# Altium PCB Smartlock.PcbDoc
Units mil, origin at the board's own origin, x right, y up, seen from the top; angles counter-clockwise.
Board outline 3085 x 2710 mil, 2 copper layers (Top Layer, Bottom Layer); 13 components, 23 nets, 69 pads, 0 vias.
Unrouted connection lines stored in the file: 1.
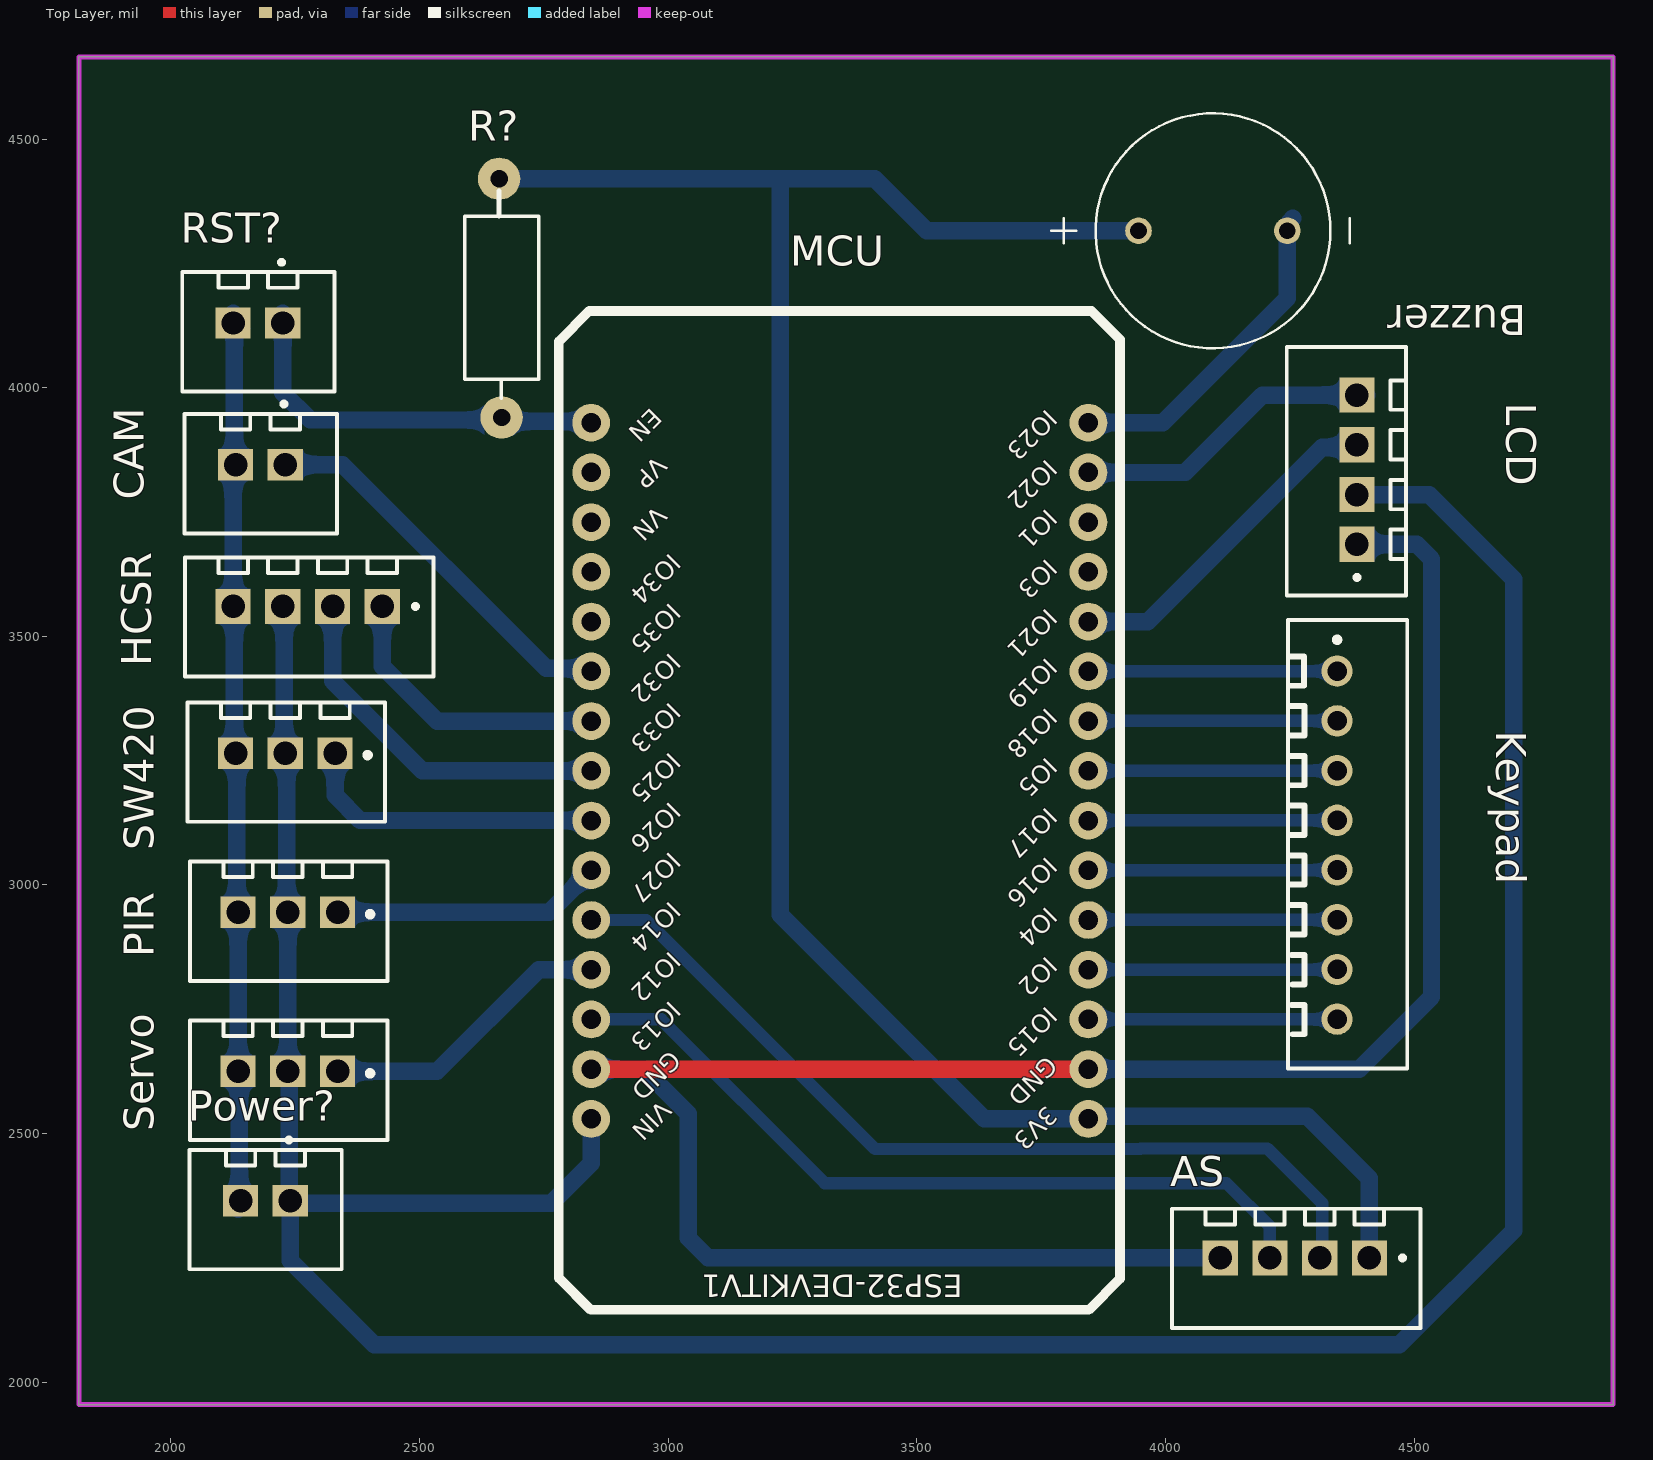
[diagram p0: Top Layer view]
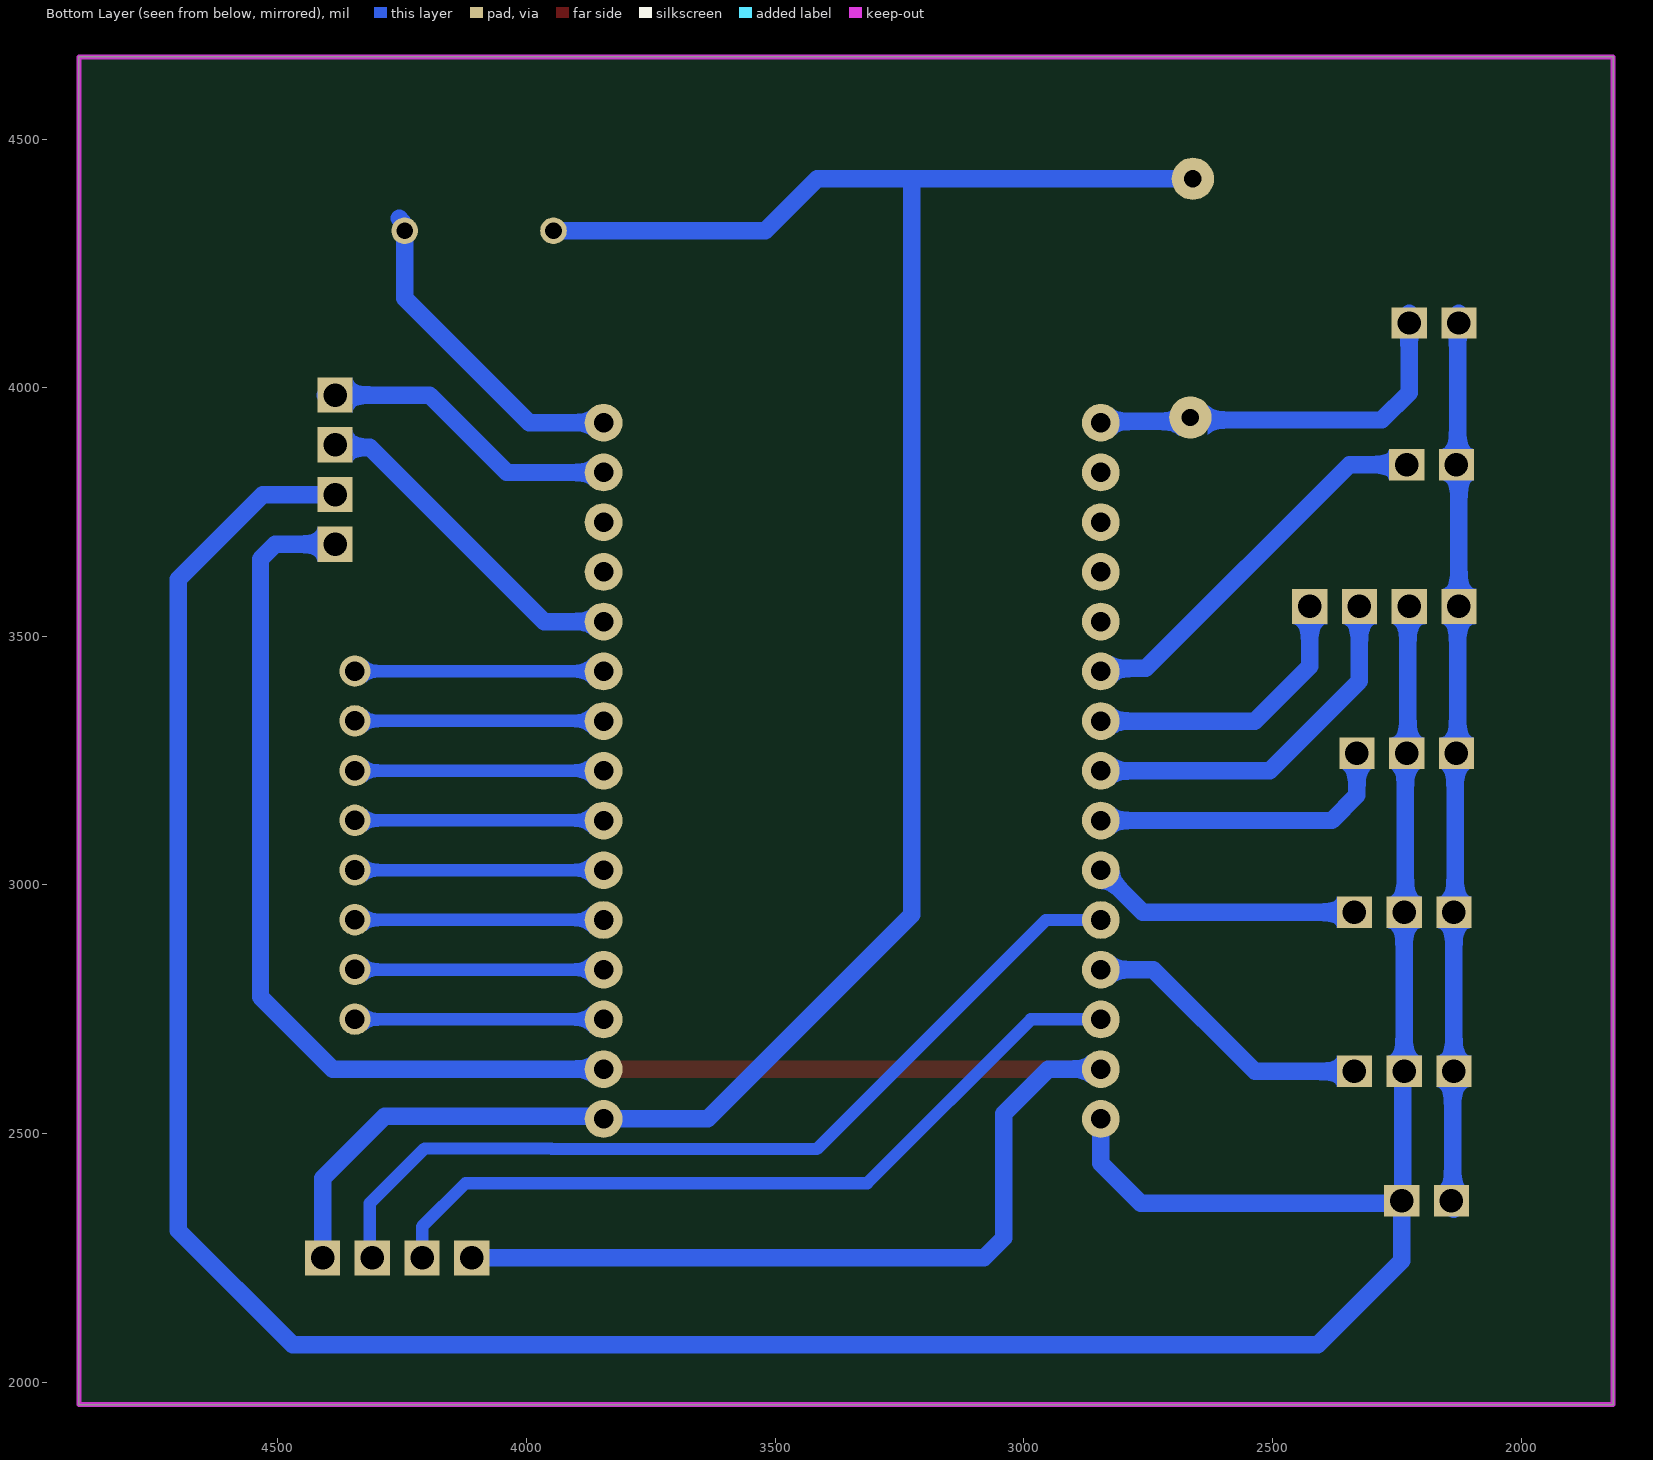
[diagram p1: Bottom Layer view, seen from below]
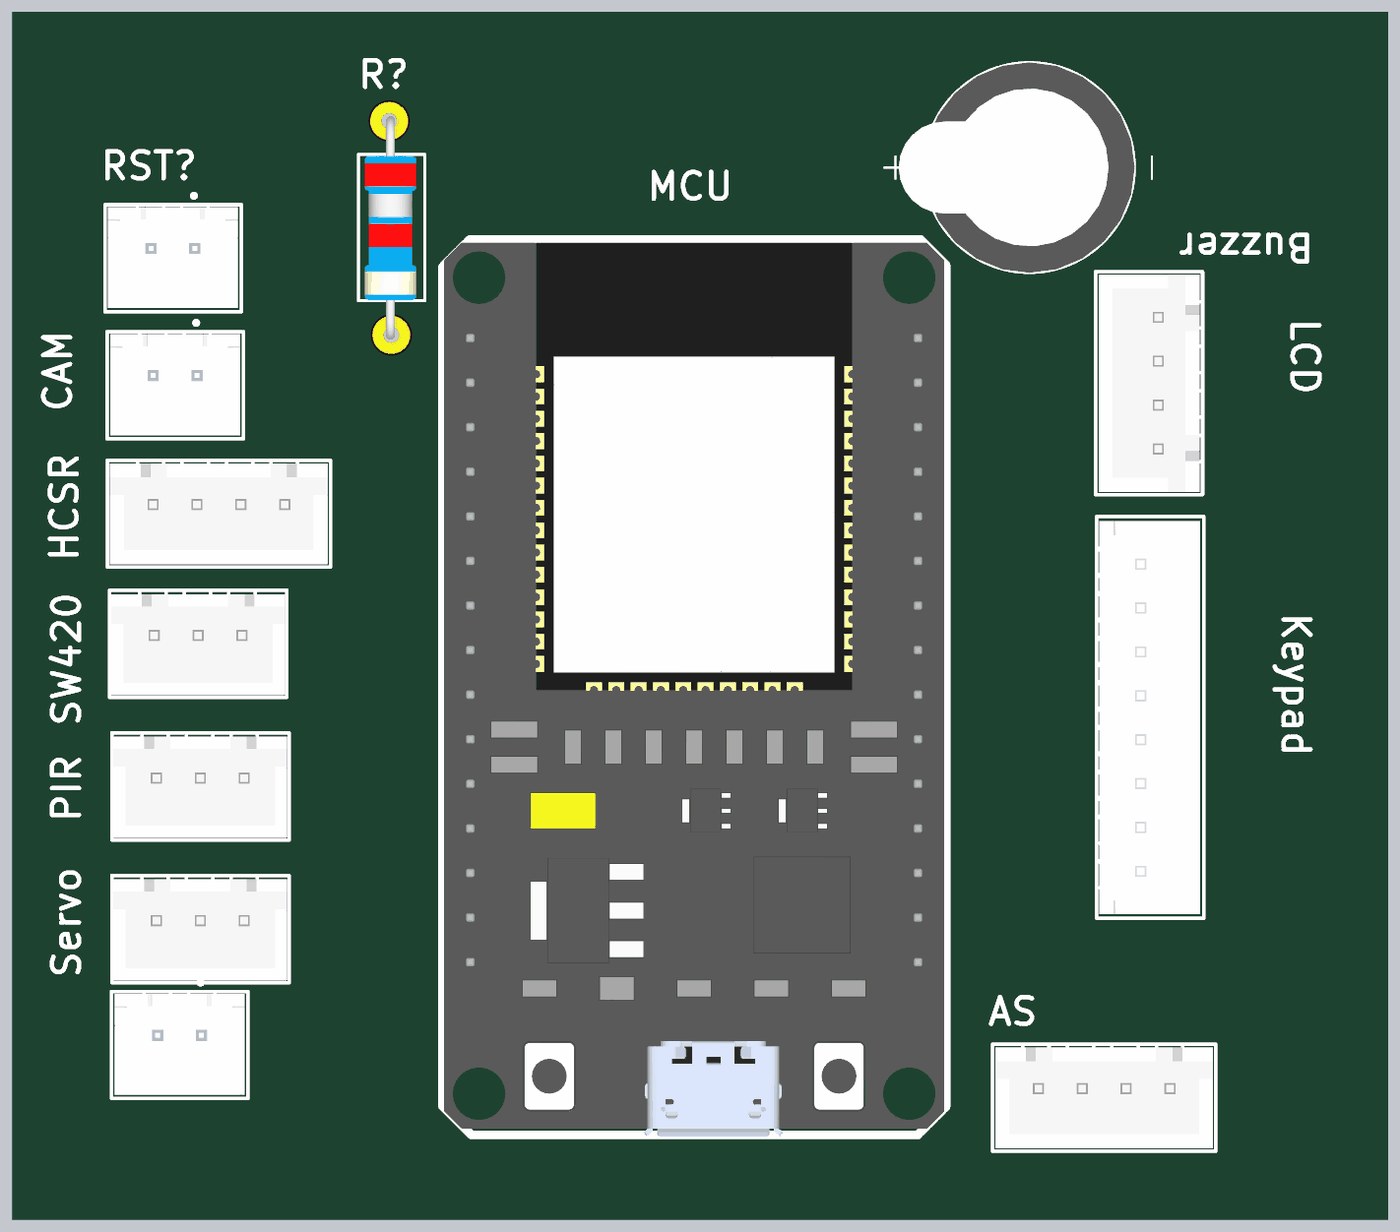
[diagram p2: 3D render of the assembled board from above, using the file's embedded part models]

## Layer stack, top to bottom
Top Solder: solder mask 0.4, Solder Resist, Dk 3.5
Top Layer: signal copper 1.4
Dielectric 1: dielectric 12.6, FR-4, Dk 4.8
Bottom Layer: signal copper 1.4
Bottom Solder: solder mask 0.4, Solder Resist, Dk 3.5

## Board outline
1815,1955 1815,4665 4900,4665 4900,1955

## Design rules (kind name [scope] priority, off if disabled: settings)
Clearance [All] p1: gap=10 ignorepadtopadclearanceinfootprint=FALSE except(0: Arc-Hole Track-Hole SMDPad-Hole THPad-Hole Via-Hole Fill-Hole Poly-Hole Region-Hole Text-Hole)
PolygonConnect [All] p1: connectstyle=Relief reliefconductorwidth=10 reliefentries=4 polygonreliefangle="90 Angle" airgapwidth=10
RoutingVias [All] p1: holewidth=28 width=50 viastyle="Through Hole" minholewidth=28 minwidth=50 maxholewidth=28 maxwidth=50
SolderMaskExpansion [All] p1: expansion=4 istentingtop=FALSE
Width [All] p1: maxlimit=35 minlimit=20 preferedwidth=25
30 further rules are at their usual default settings.

## Components (designator, comment, footprint, x,y, rotation, side; value= is the part's Value field where it differs from the comment)
AS "Header_4" HEADER_4_2P54_SHROUDED 4260,2250 r180 top
Buzzer "AI-1223-TWT-5V-R" XDCR_AI-1223-TWT-5V-R 4095.39,4315.45 r90 top
CAM "CONN HEADER VERT 2POS 2.5MM" HEADER_2 2180,3845 r180 top value=Header_2
HCSR "HCSR" HEADER_4_2P54_SHROUDED 2275,3560 r180 top
Keypad "Header_8" HEADER_8_2P54_SHROUDED 4345.39,3079.61 r270 top
LCD "Header_4" HEADER_4_2P54_SHROUDED 4385,3835 r90 top
MCU "ESP32-DEVKIT-V1" MODULE_ESP32-DEVKITV1 3345,3120 r180 top
PIR "PIR" HEADER_3_2P54_SHROUDED 2235,2945 r180 top
Power? "Power" HEADER_2 2190,2365 r180 top value=Header_2
R? "Res" RES-1/2W 2665,4200 r270 top
RST? "RST" HEADER_2 2175,4130 r180 top value=Header_2
Servo "Header_3_2p54_shrouded" HEADER_3_2P54_SHROUDED 2235,2625 r180 top
SW420 "Header_3_2p54_shrouded" HEADER_3_2P54_SHROUDED 2230,3265 r180 top

## Footprints (in the part's own frame and the unit in brackets; to place one, negate y for a bottom-side part, rotate by r counter-clockwise, add the part's x,y. Pads: shape width x height; smd on the part's side, far side on the other; paste and mask are expansions set on the pad)
HEADER_2 [mm] "HEADER_2_2P54"
  rect 1.8x1.6 hole 1.2 mask+0.1: 1(-1.27,0) 2(1.27,0)
  silkscreen extent -3.9,-3.2 3.87,3.5, body extent -3.7,-2.45 3.7,3.3, height 7
HEADER_3_2P54_SHROUDED [mm] "HEADER_3_2P0"
  rect 1.8x1.6 hole 1.2 mask+0.1: 1(-2.54,0) 2(0,0) 3(2.54,0)
  silkscreen extent -5.1,-2.6 5,3.5, body extent -4.99,-2.37 4.91,3.38, height 7
HEADER_4_2P54_SHROUDED [mm]
  rect 1.8x1.8 hole 1.2 mask+0.1: 1(-3.81,0) 2(-1.27,0) 3(1.27,0) 4(3.81,0)
  silkscreen extent -6.43,-2.51 6.27,3.59, body extent -6.28,-2.33 6.12,3.42, height 7
HEADER_8_2P54_SHROUDED [mm]
  round 1.6 hole 1 mask+0.1: 1(-8.9,-0.01) 2(-6.36,-0.01) 3(-3.82,-0.01) 4(-1.28,-0.01) 5(1.26,-0.01) 6(3.8,-0.01) 7(6.34,-0.01) 8(8.88,-0.01)
  silkscreen extent -11.51,-2.52 11.39,3.58, body extent -11.24,-2.36 11.16,3.39, height 7
MODULE_ESP32-DEVKITV1 [mil]
  round 76 / inner round 60 / far side round 76 hole 39.37: 1(-500,590.55) 2(-500,490.55) 3(-500,390.55) 4(-500,290.55) 5(-500,190.55) 6(-500,90.55) 7(-500,-9.45) 8(-500,-109.45) 9(-500,-209.45) 10(-500,-309.45) 11(-500,-409.45) 12(-500,-509.45) 13(-500,-609.45) 14(-500,-709.45) 15(-500,-809.45) 16(500,-809.45) 17(500,-709.45) 18(500,-609.45) 19(500,-509.45) 20(500,-409.45) 21(500,-309.45) 22(500,-209.45) 23(500,-109.45) 24(500,-9.45) 25(500,90.55) 26(500,190.55) 27(500,290.55) 28(500,390.55) 29(500,490.55) 30(500,590.55)
  silkscreen extent -563,-1034 565,974, body extent -560,-1027 562,978, height 283
RES-1/2W [mil]
  round 85 hole 35: 1(-220,-5) 2(260,0)
  silkscreen extent -195,-74 221,75, body extent -230,-60 270,56, height 121
XDCR_AI-1223-TWT-5V-R [mm]
  round 1.358 hole 0.85: N(0,-3.8) P(0,3.8)
  silkscreen extent -6,-6.98 6,8.25, body extent -6,-6 6,7.44, height 9.7

## Part data
Buzzer: Package=None, Availability=Unavailable, MF="{'manufacturer': u'PUI Audio,'}", MP=AI-1223-TWT-5V-R, Price=None
CAM: library part Header_2, Manufacturer="JST Sales America Inc.", Part Number=B2B-XH-A(LF)(SN), Description SEL="CONN HEADER VERT 2POS 2.5MM", Footprint Type=TH, Part Code=S1900-000037, Point=2
HCSR: library part Header_4, Description SEL=Header_4, Footprint Type=TH, Part Code=S1900-000023, Point=4
MCU: "Dual core, Wi-Fi: 2.4 GHz up to 150 Mbits/s,BLE (Bluetooth Low Energy) and legacy Bluetooth, 32 bits, Up to 240 MHz", Package=None, Availability=Unavailable, MF="{'manufacturer': u'Do it'}", MP=ESP32-DEVKIT-V1, Price=None
PIR: library part Header_3_2p54_shrouded, Description SEL=Header_3, Footprint Type=TH, Part Code=S1900-000021, Point=3
Power? RST?: library part Header_2, "CONN HEADER VERT 2POS 2.5MM", Manufacturer="JST Sales America Inc.", Part Number=B2B-XH-A(LF)(SN), Description SEL="CONN HEADER VERT 2POS 2.5MM", Footprint Type=TH, Part Code=S1900-000037, Point=2
R?: Manufacturer="Generic Components", Class=Passive, Published=08/06/2000, Publisher="Altium Hobart Technology Centre", SubClass=R
AS LCD: Description SEL=Header_4, Footprint Type=TH, Part Code=S1900-000023, Point=4
Keypad: Description SEL=Header_8, Footprint Type=TH, Part Code=S1900-000027, Point=8
Servo SW420: Description SEL=Header_3, Footprint Type=TH, Part Code=S1900-000021, Point=3

## Nets (pads, with @x,y where several pads share a name; then routed paths per layer and width w, separated by ;. In a path a pad name is that pad's centre, name@x,y a point inside that pad or via, vN(x,y) a via of type N, cw(c..) or ccw(c..) an arc to the next point about the centre after c; other vN are vias at no path point)
3v3: AS.1 Buzzer.P MCU.1 R?.1 | length 4378.2
  Bottom Layer w35: R?.1 3225,4420 ; Buzzer.P 3519.55,4315.45 3415,4420 3225,4420 ; AS.1 4410,2410 4285,2535 3850.55,2535 MCU.1 3635.55,2529.45 3225,2940 3225,4420
5v: HCSR.3 LCD.2 MCU.30 PIR.2 Power?.1 Servo.2 SW420.2 | length 6377.4
  Bottom Layer w35: HCSR.3 2227.5,3557.5 2227.5,3267.5 SW420.2 2232.5,3262.5 2232.5,2947.5 PIR.2 Servo.2 2237.5,2622.5 2237.5,2360 Power?.1@2240,2360 ; Power?.1 Power?.1@2240,2360 ; MCU.30 2845,2440 2765,2360 Power?.1@2240,2360 ; LCD.2 4530,3785 4700,3615 4700,2305 4470,2075 2408.99,2075 2239.5,2244.5 2240,2245 Power?.1@2240,2360
GND: AS.4 CAM.2 HCSR.4 LCD.1 MCU.2 MCU.29 PIR.3 Power?.2 RST?.2 Servo.3 SW420.3 | length 6152.1
  Top Layer w35: MCU.29 MCU.2
  Bottom Layer w35: CAM.2@2125,3835 HCSR.4 2127.5,3557.5 2127.5,3267.5 SW420.3 2132.5,3262.5 2132.5,2947.5 PIR.3 Servo.3 2137.5,2622.5 Power?.2@2137.5,2360 ; RST?.2@2125,4150 2127.5,4147.5 2127.5,3847.5 CAM.2 ; Power?.2@2135,2347.5 Power?.2@2137.5,2350 ; MCU.29 2950.55,2629.45 3040,2540 3040,2290 3080,2250 AS.4 ; MCU.2 4389.45,2629.45 4535,2775 4535,3655 4505,3685 LCD.1
NetAS_2: AS.2 MCU.26 | length 1818.8
  Bottom Layer w25: MCU.26 2955.55,2929.45 3416.05,2468.95 3948.95,2468.95 3950,2470 4205,2470 4315,2360 4315,2255 AS.2
NetAS_3: AS.3 MCU.28 | length 1600.3
  Bottom Layer w25: MCU.28 2985.55,2729.45 3315,2400 4122.68,2400 4210,2312.68 AS.3
NetBuzzer_N: Buzzer.N MCU.15 | length 668.9
  Bottom Layer w35: MCU.15 3994.45,3929.45 4245,4180 4245,4275.89 Buzzer.N 4248.53,4318.98 4248.53,4332.8 4256.18,4340.45
NetCAM_1: CAM.1 MCU.21 | length 787.1
  Bottom Layer w35: CAM.1 2345,3845 2754.5,3435.5 2838.95,3435.5 MCU.21
NetHCSR_1: HCSR.1 MCU.22 | length 585.8
  Bottom Layer w35: HCSR.1 2425,3440 2535.55,3329.45 MCU.22
NetHCSR_2: HCSR.2 MCU.23 | length 744.8
  Bottom Layer w35: HCSR.2 2325,3410 2505.55,3229.45 MCU.23
NetKeypad_1: Keypad.1 MCU.10 | length 500.2
  Bottom Layer w25: MCU.10 3845.28,3429.72 4344.72,3429.72 Keypad.1
NetKeypad_2: Keypad.2 MCU.9 | length 500.2
  Bottom Layer w25: MCU.9 3845.28,3329.72 4344.72,3329.72 Keypad.2
NetKeypad_3: Keypad.3 MCU.8 | length 500.2
  Bottom Layer w25: MCU.8 3845.28,3229.72 4344.72,3229.72 Keypad.3
NetKeypad_4: Keypad.4 MCU.7 | length 500.2
  Bottom Layer w25: MCU.7 3845.28,3129.72 4344.72,3129.72 Keypad.4
NetKeypad_5: Keypad.5 MCU.6 | length 500.2
  Bottom Layer w25: MCU.6 3845.28,3029.72 4344.72,3029.72 Keypad.5
NetKeypad_6: Keypad.6 MCU.5 | length 500.2
  Bottom Layer w25: MCU.5 3845.28,2929.72 4344.72,2929.72 Keypad.6
NetKeypad_7: Keypad.7 MCU.4 | length 500.2
  Bottom Layer w25: MCU.4 3845.28,2829.72 4344.72,2829.72 Keypad.7
NetKeypad_8: Keypad.8 MCU.3 | length 500.2
  Bottom Layer w25: MCU.3 3845.28,2729.72 4344.72,2729.72 Keypad.8
NetLCD_3: LCD.3 MCU.11 | length 687.3
  Bottom Layer w35: MCU.11 3964.45,3529.45 4315,3880 4380,3880 LCD.3
NetLCD_4: LCD.4 MCU.14 | length 624.5
  Bottom Layer w35: MCU.14 4039.45,3829.45 4195,3985 LCD.4@4405.08,3985
NetMCU_16: MCU.16 R?.2 RST?.1 | length 805.1
  Bottom Layer w35: RST?.1@2225,4150 2225,3990 2280,3935 2660,3935 2662.78,3932.22 2842.22,3932.22 MCU.16
NetMCU_24: MCU.24 SW420.1 | length 620.9
  Bottom Layer w35: SW420.1 2330,3180 2380.55,3129.45 MCU.24
NetMCU_25: MCU.25 PIR.1 | length 545
  Bottom Layer w35: PIR.1 2760.55,2945 MCU.25
NetMCU_27: MCU.27 Servo.1 | length 594.7
  Bottom Layer w35: Servo.1 2535,2625 2739.45,2829.45 MCU.27
pads on no net: MCU.12 MCU.13 MCU.17 MCU.18 MCU.19 MCU.20

## Keep-outs
Keep-Out Layer:
  the board outline again, w10

## Text inside footprints (layer, text, board x,y; h text height)
AS: Mechanical 1 "1" at 4417.87,2265.75 h31.5 r180; Mechanical 1 "2" at 4323.39,2265.75 h31.5 r180; Mechanical 1 "3" at 4221.02,2265.75 h31.5 r180; Mechanical 1 "4" at 4122.6,2265.75 h31.5 r180
CAM: Mechanical 1 "2" at 2141.81,3860.75 h31.5 r180; Mechanical 1 "1" at 2236.3,3860.75 h31.5 r180
HCSR: Mechanical 1 "1" at 2432.87,3575.75 h31.5 r180; Mechanical 1 "2" at 2338.39,3575.75 h31.5 r180; Mechanical 1 "3" at 2236.02,3575.75 h31.5 r180; Mechanical 1 "4" at 2137.6,3575.75 h31.5 r180
Keypad: Mechanical 1 "8" at 4325.31,2741.42 h31.5 r270; Mechanical 1 "7" at 4325.31,2837.09 h31.5 r270; Mechanical 1 "6" at 4327.28,2940.63 h31.5 r270; Mechanical 1 "5" at 4329.25,3037.87 h31.5 r270; Mechanical 1 "1" at 4329.25,3434.72 h31.5 r270; Mechanical 1 "2" at 4329.25,3340.24 h31.5 r270; Mechanical 1 "3" at 4329.25,3238.66 h31.5 r270; Mechanical 1 "4" at 4329.25,3140.24 h31.5 r270
LCD: Mechanical 1 "4" at 4400.75,3972.4 h31.5 r90; Mechanical 1 "3" at 4400.75,3873.98 h31.5 r90; Mechanical 1 "2" at 4400.75,3771.61 h31.5 r90; Mechanical 1 "1" at 4400.75,3677.13 h31.5 r90
MCU: Top Overlay "EN" at 2957.2,3970 h62 r225; Top Overlay "VP" at 2967.05,3872.75 h62 r225; Top Overlay "VN" at 2967.05,3772.75 h62 r225; Top Overlay "IO34" at 2995.4,3677.09 h62 r225; Top Overlay "IO35" at 2995.4,3577.09 h62 r225; Top Overlay "IO32" at 2995.4,3477.09 h62 r225; Top Overlay "IO33" at 2995.4,3377.09 h62 r225; Top Overlay "IO25" at 2995.4,3277.09 h62 r225; Top Overlay "IO26" at 2995.4,3177.09 h62 r225; Top Overlay "IO27" at 2995.4,3077.09 h62 r225; Top Overlay "IO14" at 2995.4,2977.09 h62 r225; Top Overlay "IO12" at 2995.4,2877.09 h62 r225; Top Overlay "IO13" at 2995.4,2777.09 h62 r225; Top Overlay "GND" at 2995.4,2677.09 h62 r225; Top Overlay "VIN" at 2976.1,2576.69 h62 r225; Top Overlay "IO23" at 3751.69,3966.45 h62 r225; Top Overlay "IO22" at 3751.69,3866.45 h62 r225; Top Overlay "IO1" at 3751.69,3766.45 h62 r225; Top Overlay "IO3" at 3751.69,3666.45 h62 r225; Top Overlay "IO21" at 3751.69,3566.45 h62 r225; Top Overlay "IO19" at 3751.69,3466.45 h62 r225; Top Overlay "IO18" at 3751.69,3366.45 h62 r225; Top Overlay "IO5" at 3751.69,3266.45 h62 r225; Top Overlay "IO17" at 3751.69,3166.45 h62 r225; Top Overlay "IO16" at 3751.69,3066.45 h62 r225; Top Overlay "IO4" at 3751.69,2966.45 h62 r225; Top Overlay "IO2" at 3751.69,2866.45 h62 r225; Top Overlay "IO15" at 3751.69,2766.45 h62 r225; Top Overlay "GND" at 3751.69,2666.45 h62 r225; Top Overlay "3V3" at 3751.69,2566.45 h62 r225; Top Overlay "ESP32-DEVKITV1" at 3592.64,2231.42 h77.5 r180
PIR: Mechanical 1 "3" at 2144.45,2960.75 h31.5 r180; Mechanical 1 "2" at 2246.81,2960.75 h31.5 r180; Mechanical 1 "1" at 2341.3,2960.75 h31.5 r180
Power?: Mechanical 1 "2" at 2151.81,2380.75 h31.5 r180; Mechanical 1 "1" at 2246.3,2380.75 h31.5 r180
RST?: Mechanical 1 "2" at 2136.81,4145.75 h31.5 r180; Mechanical 1 "1" at 2231.3,4145.75 h31.5 r180
Servo: Mechanical 1 "3" at 2144.45,2640.75 h31.5 r180; Mechanical 1 "2" at 2246.81,2640.75 h31.5 r180; Mechanical 1 "1" at 2341.3,2640.75 h31.5 r180
SW420: Mechanical 1 "3" at 2139.45,3280.75 h31.5 r180; Mechanical 1 "2" at 2241.81,3280.75 h31.5 r180; Mechanical 1 "1" at 2336.3,3280.75 h31.5 r180